# Altium PCB A3979alone.PcbDoc
Units mm, origin at the board's own origin, x right, y up, seen from the top; angles counter-clockwise.
Board outline 64 x 86 mm, 2 copper layers (Top Layer, Bottom Layer); 30 components, 35 nets, 135 pads, 63 vias.
Unrouted connection lines stored in the file: 1.
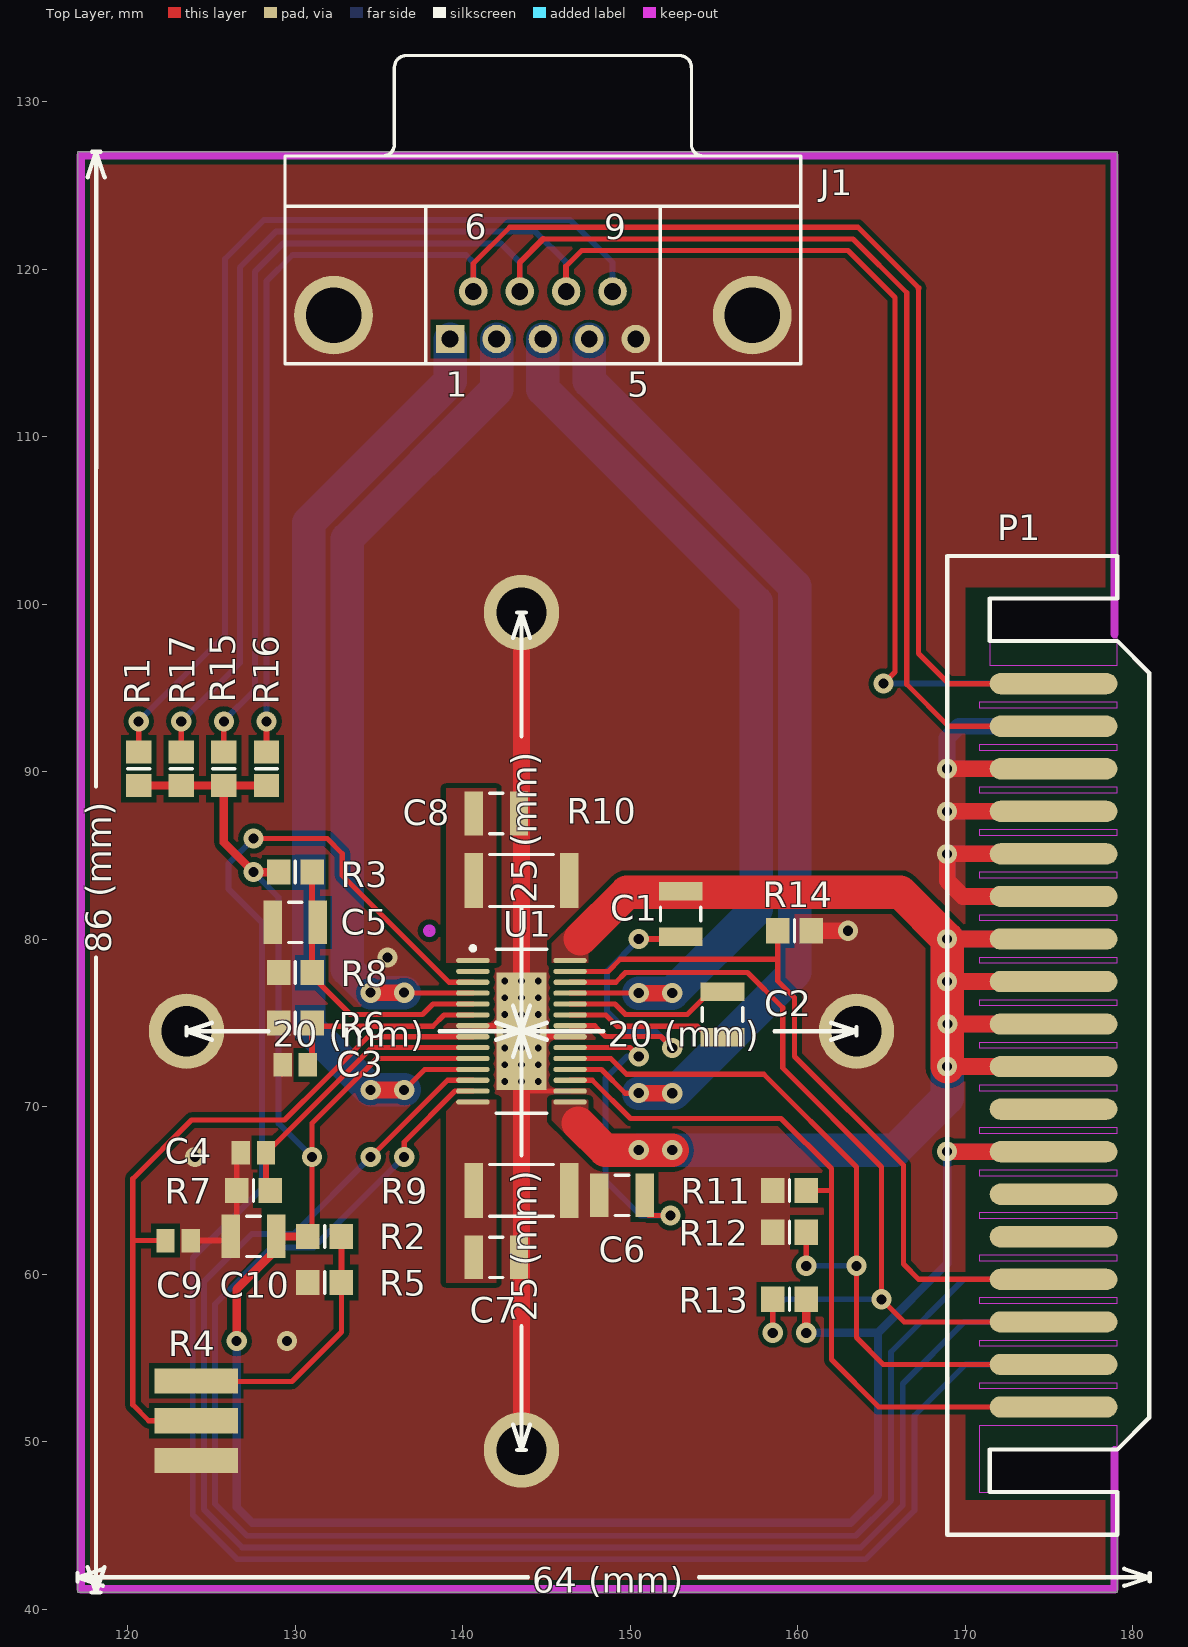
[diagram p0: Top Layer view]
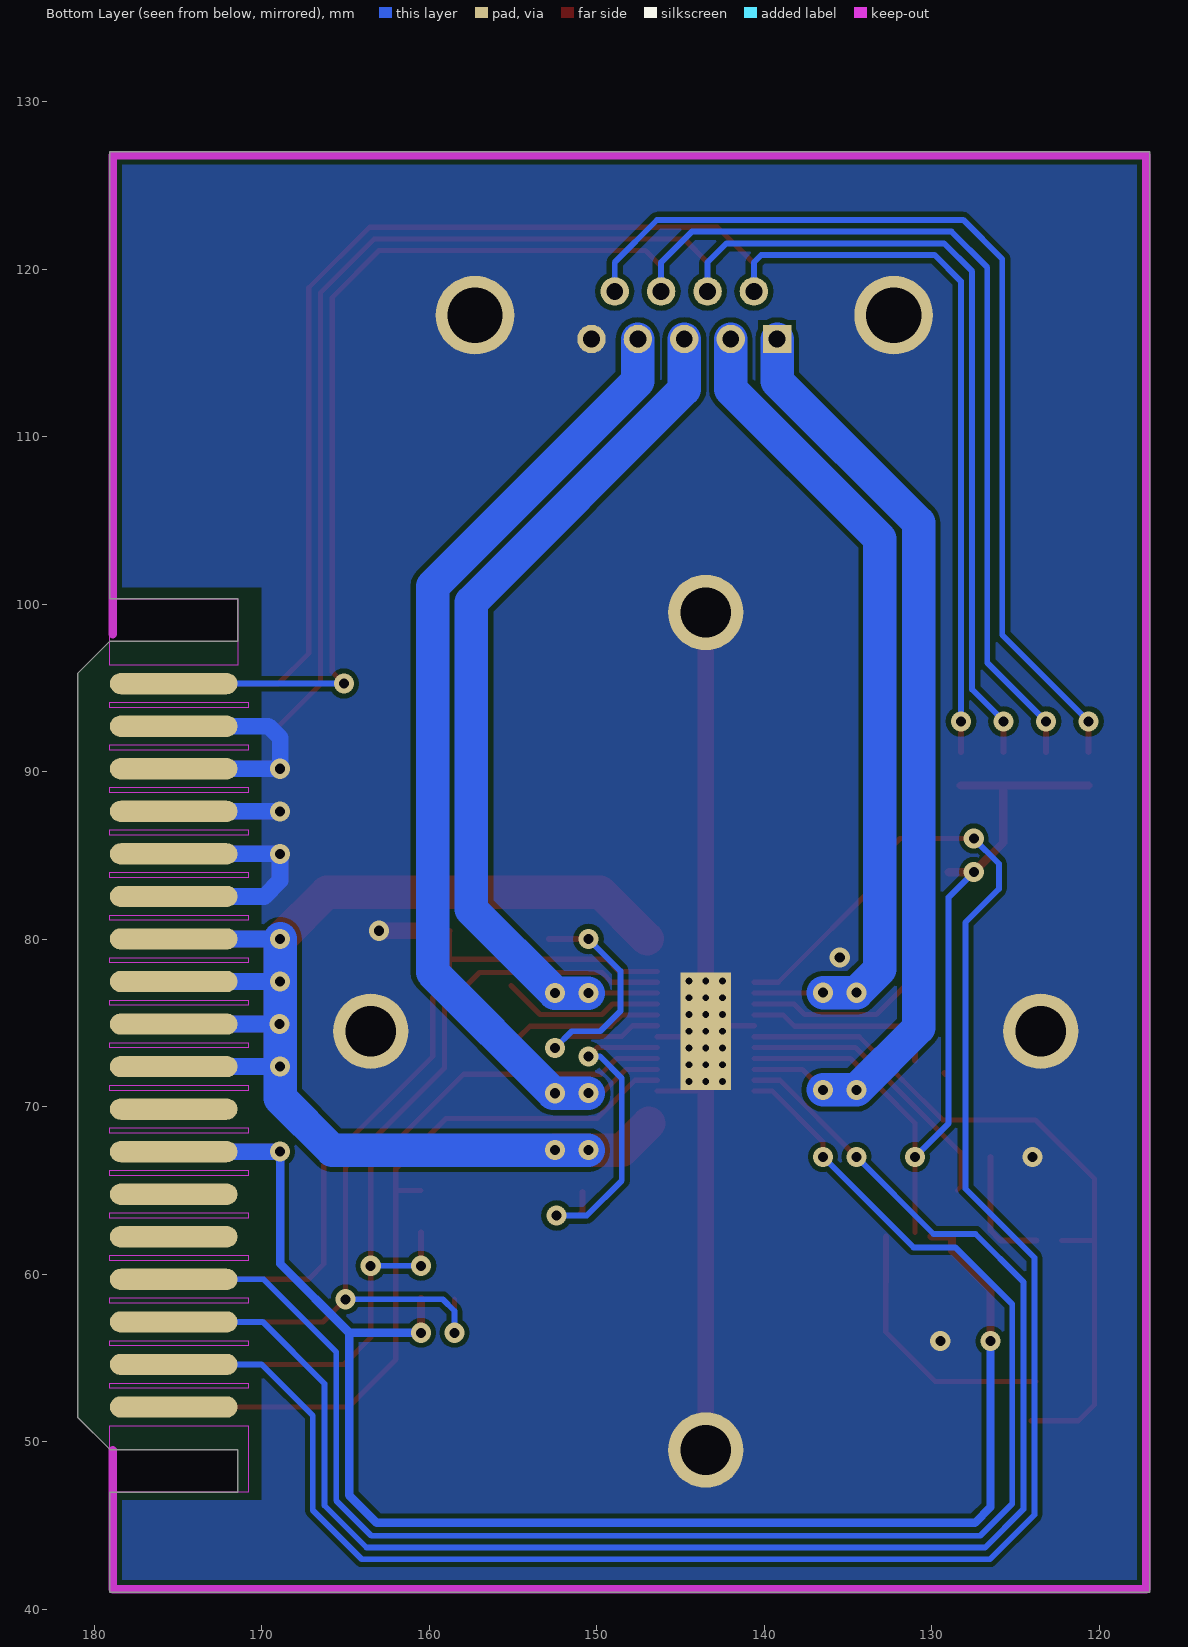
[diagram p1: Bottom Layer view, seen from below]

## Layer stack, top to bottom
Top Layer: signal copper 0.0356
Dielectric: core 0.32, FR-4, Dk 4.8
Bottom Layer: signal copper 0.0356

## Board outline
117,41 179.07,41 179.07,46.99 171.45,46.99 171.45,49.53 179.07,49.53 181,51.46 181,95.86 179.07,97.79 171.45,97.79 171.45,100.33 179.07,100.33 179.07,127 117,127

## Design rules (kind name [scope] priority, off if disabled: settings)
Clearance [All] p1: gap=0.3
PlaneClearance [All] p1: clearance=0.5
PlaneConnect [All] p1: planeconnectstyle=Direct reliefexpansion=0.508 reliefentries=4 reliefconductorwidth=0.254 reliefairgap=0.254
PolygonConnect [All] p1: connectstyle=Direct reliefconductorwidth=0.254 reliefentries=4 polygonreliefangle="90 Angle"
RoutingVias [All] p1: holewidth=0.6 width=1.2 viastyle="Through Hole" minholewidth=0.2 minwidth=0.6 maxholewidth=0.9 maxwidth=1.3
SMDNeckDown [All] p1: percent=200.000
SilkscreenOverComponentPads [All] p1: minsilkscreentomaskgap=0.254
SolderMaskExpansion [All] p1: expansion=0.102
Width [All] p1: maxlimit=2 minlimit=0.31 preferedwidth=0.35 checkconnectedcopper=TRUE
25 further rules are at their usual default settings.

## Components (designator, comment, footprint, x,y, rotation, side; value= is the part's Value field where it differs from the comment)
C1 "Cap" CAPC3225L 153,81.5 r90 top
C2 "Cap" CapC3225L 155.5,75.5 r270 top
C3 "Cap" CAPC2012L 130,72.5 r0 top
C4 "Cap" CAPC2012L 127.5,67.25 r0 top
C5 "Cap" CAPC3225L 130,81 r0 top
C6 "Cap" CAPC3225L 149.5,64.7 r0 top
C7 "Cap" CAPC3225L 142,61 r180 top
C8 "Cap" CAPC3225L 142,87.5 r180 top
C9 "Cap" CAPC2012L 123,62 r180 top
C10 "Cap" CAPC3225L 127.5,62.25 r0 top
J1 "D Connector 9" D-SUB-9 144.78,115.824 r0 top locked
P1 "18x2 Slot" SL-36 180.34,52.07 r90 top
R1 "Res2" RESC2012M 120.65,90.17 r90 top
R2 "Res2" RESC2012M 131.75,62.25 r180 top
R3 "Res2" RESC2012M 130,84 r180 top
R4 "RPot SM" VARRES1 122.5,51.25 r180 top
R5 "Res2" RESC2012M 131.75,59.5 r0 top
R6 "Res2" RESC2012M 130,75 r0 top
R7 "Res2" RESC2012M 127.5,65 r0 top
R8 "Res2" RESC2012M 130,78 r0 top
R9 "Res2" RESC6332L 143.5,65 r180 top
R10 "Res2" RESC6332L 143.5,83.5 r180 top
R11 "Res2" RESC2012M 159.5,65 r0 top
R12 "Res2" RESC2012M 159.5,62.5 r0 top
R13 "Res2" RESC2012M 159.5,58.5 r180 top
R14 "Res2" RESC2012M 159.8,80.5 r180 top
R15 "Res2" RESC2012M 125.73,90.17 r90 top
R16 "Res2" RESC2012M 128.27,90.17 r90 top
R17 "Res2" RESC2012M 123.19,90.17 r270 top
U1 "A3979" TSOP65P640_HS-28AM 143.5,74.5 r0 top

## Footprints (in the part's own frame and the unit in brackets; to place one, negate y for a bottom-side part, rotate by r counter-clockwise, add the part's x,y. Pads: shape width x height; smd on the part's side, far side on the other; paste and mask are expansions set on the pad)
CAPC2012L [mm] "Chip Capacitor, Body 2.0x1.3mm, IPC High Density"
  rect 1.1x1.4 smd: 1(-0.75,0) 2(0.75,0)
  body extent -1.1,-0.72 1.1,0.72, height 1.4
CAPC3225L [mm] "Chip Capacitor, Body 3.2x2.5mm, IPC High Density"
  rect 1.1x2.6 smd: 1(-1.35,0) 2(1.35,0)
  silkscreen extent -0.4,-1.2 0.4,1.2, body extent -1.7,-1.35 1.7,1.35, height 1.5
CapC3225L [mm] "Chip Capacitor, Body 3.2x2.5mm, IPC High Density"
  rect 1.1x2.6 smd: 1(-1.35,0) 2(1.35,0)
  silkscreen extent -0.4,-1.2 0.4,1.2, body extent -1.7,-1.35 1.7,1.35, height 1.5
D-SUB-9 [mm] "Connector"
  rect 1.7x1.7 hole 1: 1(-5.54,0)
  round 1.7 hole 1: 2(-2.77,0) 3(0,0) 4(2.77,0) 5(5.54,0) 6(-4.155,2.84) 7(-1.385,2.84) 8(1.385,2.84) 9(4.155,2.84)
  round 4.7 hole 3.3: 10(-12.495,1.42) 11(12.495,1.42)
  silkscreen extent -15.4,-1.48 15.4,16.92, body extent -15.49,-1.52 15.49,17.02, height 6.35
RESC2012M [mm] "Chip Resistor, Body 2.0x1.2mm, IPC Low Density"
  rect 1.4x1.5 smd: 1(-1,0) 2(1,0)
  silkscreen extent 0,-0.65 0,0.65, body extent -1.07,-0.7 1.07,0.7, height 0.7
RESC6332L [mm] "Chip Resistor, Body 6.3x3.2mm, IPC High Density"
  rect 1.1x3.3 smd: 1(-2.85,0) 2(2.85,0)
  silkscreen extent -1.9,-1.55 1.9,1.55, body extent -3.22,-1.68 3.22,1.68, height 0.9
SL-36 [mm]
  oval 1.27x7.62 smd: 1(0,5.08) 2(2.54,5.08) 3(5.08,5.08) 4(7.62,5.08) 5(10.16,5.08) 6(12.7,5.08) 7(15.24,5.08) 8(17.78,5.08) 9(20.32,5.08) 10(22.86,5.08) 11(25.4,5.08) 12(27.94,5.08) 13(30.48,5.08) 14(33.02,5.08) 15(35.56,5.08) 16(38.1,5.08) 17(40.64,5.08) 18(43.18,5.08)
  oval 1.27x7.62 smd far side: 19(0,5.08) 20(2.54,5.08) 21(5.08,5.08) 22(7.62,5.08) 23(10.16,5.08) 24(12.7,5.08) 25(15.24,5.08) 26(17.78,5.08) 27(20.32,5.08) 28(22.86,5.08) 29(25.4,5.08) 30(27.94,5.08) 31(30.48,5.08) 32(33.02,5.08) 33(35.56,5.08) 34(38.1,5.08) 35(40.64,5.08) 36(43.18,5.08)
  Keep-Out Layer region: 41.751,1.27 42.069,1.27 42.069,9.525 41.751,9.525
  Keep-Out Layer region: 39.211,1.27 39.529,1.27 39.529,9.525 39.211,9.525
  Keep-Out Layer region: 36.671,1.27 36.989,1.27 36.989,9.525 36.671,9.525
  Keep-Out Layer region: 34.131,1.27 34.449,1.27 34.449,9.525 34.131,9.525
  Keep-Out Layer region: 31.591,1.27 31.909,1.27 31.909,9.525 31.591,9.525
  Keep-Out Layer region: 29.051,1.27 29.369,1.27 29.369,9.525 29.051,9.525
  Keep-Out Layer region: 26.511,1.27 26.829,1.27 26.829,9.525 26.511,9.525
  Keep-Out Layer region: 23.971,1.27 24.289,1.27 24.289,9.525 23.971,9.525
  Keep-Out Layer region: 21.431,1.27 21.749,1.27 21.749,9.525 21.431,9.525
  Keep-Out Layer region: 18.891,1.27 19.209,1.27 19.209,9.525 18.891,9.525
  Keep-Out Layer region: 16.351,1.27 16.669,1.27 16.669,9.525 16.351,9.525
  Keep-Out Layer region: 13.811,1.27 14.129,1.27 14.129,9.525 13.811,9.525
  Keep-Out Layer region: 11.271,1.27 11.589,1.27 11.589,9.525 11.271,9.525
  Keep-Out Layer region: 8.731,1.27 9.049,1.27 9.049,9.525 8.731,9.525
  Keep-Out Layer region: 6.191,1.27 6.509,1.27 6.509,9.525 6.191,9.525
  Keep-Out Layer region: 3.651,1.27 3.969,1.27 3.969,9.525 3.651,9.525
  Keep-Out Layer region: 44.291,1.27 48.26,1.27 48.26,8.89 44.291,8.89
  Keep-Out Layer region: -5.08,1.27 -1.111,1.27 -1.111,9.525 -5.08,9.525
  Keep-Out Layer region: 1.111,1.27 1.429,1.27 1.429,9.525 1.111,9.525
  silkscreen extent -7.62,-0.64 50.8,11.43
TSOP65P640_HS-28AM [mm] "TSOP, 28-Leads, Body 9.7x4.4mm, Pitch 0.65mm, Exposed Pad, IPC Low Density"
  oval 2x0.31 smd: 1(-2.9,4.225) 2(-2.9,3.575) 3(-2.9,2.925) 4(-2.9,2.275) 5(-2.9,1.625) 6(-2.9,0.975) 7(-2.9,0.325) 8(-2.9,-0.325) 9(-2.9,-0.975) 10(-2.9,-1.625) 11(-2.9,-2.275) 12(-2.9,-2.925) 13(-2.9,-3.575) 14(-2.9,-4.225) 15(2.9,-4.225) 16(2.9,-3.575) 17(2.9,-2.925) 18(2.9,-2.275) 19(2.9,-1.625) 20(2.9,-0.975) 21(2.9,-0.325) 22(2.9,0.325) 23(2.9,0.975) 24(2.9,1.625) 25(2.9,2.275) 26(2.9,2.925) 27(2.9,3.575) 28(2.9,4.225)
  rect 3x7 all layers, no hole: 29(0,0)
  silkscreen extent -3.02,-4.9 1.5,5.07, body extent -2.25,-4.9 2.25,4.9, height 1.1
VARRES1 [mm] "Подстроечный резистор вертикально"
  rect 5x1.5 smd: CCW(-1.587,-2.381) CW(-1.588,2.381) W(-1.587,0)
  body extent 1.5,-3.19 5.5,3.19, height 6.37

## Part data
C1 C2 C3 C4 C5 C6 C7 C8 C9 C10: "Capacitor"
J1: "Receptacle Assembly, 9 Position, Right Angle"
R1 R2 R3 R5 R6 R7 R8 R9 R10 R11 R12 R13 R14 R15 R16 R17: "Resistor"
R4: "Square Trimming Potentiometer"
U1: "Microstepping DMOS Driver with Translator 2.5A"

## Free pads (board coordinates)
  round 4.5 hole 3: 0(123.5,74.5) 0(143.5,49.5) 0(143.5,99.5) 0(163.5,74.5)

## Via types
v1: diameter 1.2, hole 0.6, Top Layer to Bottom Layer, 42 vias
v2: diameter 0.8, hole 0.4, Top Layer to Bottom Layer, 21 vias

## Nets (pads, with @x,y where several pads share a name; then routed paths per layer and width w, separated by ;. In a path a pad name is that pad's centre, name@x,y a point inside that pad or via, vN(x,y) a via of type N, cw(c..) or ccw(c..) an arc to the next point about the centre after c; other vN are vias at no path point)
+30: C1.2 P1.9 P1.10 P1.11 P1.12 P1.27 P1.28 P1.29 P1.30 U1.15 U1.28 | length 120.7
  Top Layer w1: v1(168.91,72.39) P1.9 ; v1(168.91,77.47) P1.11 P1.11@172.72,77.47 ; v1(168.91,80.01) P1.12 ; P1.10 v1(168.94,74.93) ; v1(168.94,74.93) 168.91,74.9 v1(168.94,74.93)
  Top Layer w2: 146.9,69 148.5,67.4 v1(152.5,67.4) ; 147.002,80.01 149.792,82.8 166.12,82.8 v1(168.91,80.01) v1(168.91,72.39)
  Bottom Layer w1: v1(168.91,72.39) P1.27 ; v1@168.91,74.93 P1.28 ; v1(168.91,77.47) P1.29 ; v1(168.91,80.01) P1.30
  Bottom Layer w2: v1(150.5,67.4) 165.8,67.4 168.91,70.51 v1(168.91,72.39) v1(168.91,77.47) v1(168.91,80.01)
DIR: P1.20 U1.3 | length 121.6
  Top Layer w0.31: v1(127.5,86) 131.9,86 132.8,85.1 132.8,83.8 139.175,77.425 U1.3
  Bottom Layer w0.35: v1(127.5,86) 126,84.5 126,83 128,81 128,65.1 123.88,60.98 123.88,45.636 126.534,42.982 164.041,42.982 166.957,45.899 166.957,51.557 170.01,54.61 170.51,54.61 ; 170.5,54.6 170.51,54.61 ; P1.20 170.51,54.61
ENABLE: P1.3 R13.2 U1.26 | length 54.6
  Top Layer w0.31: U1.26 149.125,77.425 149.7,78 157,78 159.1,75.9 159.1,72.3 165,66.4 v1(165,58.5) 166.35,57.15 P1.3 ; v1(158.5,56.5) R13.2
  Bottom Layer w0.35: v1(158.5,56.5) 158.5,57.8 159.2,58.5 v1(165,58.5)
GND: C3.1 C4.1 C5.1 C6.1 C7.1 C8.1 C9.1 C10.1 J1.5 J1.10 J1.11 P1.13 P1.14 P1.15 P1.16 P1.31 P1.32 P1.33 P1.34 P1.35 pad.0 R4.CW R5.1 R6.1 R7.1 R8.1 R9.1 R10.1 R11.1 R12.1 R14.1 U1.7 U1.16 U1.21 U1.29 | length 131.7
  Top Layer w0.31: U1.7 U1.29@143.475,74.825 ; 143.525,70.925 U1.16 ; U1.29@143.525,74.175 U1.21
  Top Layer w0.35: C9.1 125.9,62 126.5,62.6 C4.1@126.5,67 ; C3.1@129.2,71.95 C3.1@129.25,72 ; U1.29@143.475,74.825 U1.29@143.5,74.8 ; 143.5,70.9 143.525,70.925 ; U1.29@143.5,74.2 U1.29@143.525,74.175
  Top Layer w1: pad.0@143.5,49.5 pad.0@143.5,99.5 ; R14.1 v1(163,80.5) ; v1(168.91,87.63) P1.15 ; v1(168.91,90.17) P1.16 ; P1.13 169.85,82.55 168.91,83.49 v1(168.91,85.09) P1.14
  Bottom Layer w0.254: v1@168.9,90.18 v1(168.91,90.17)
  Bottom Layer w1: v1@168.9,90.18 168.9,92 169.61,92.71 P1.35 ; v1(168.91,87.63) P1.33 ; v1(168.91,90.17) P1.34 ; P1.31 169.85,82.55 168.91,83.49 v1(168.91,85.09) P1.32
  other v1: 129.5,56 124,67 135.5,78.9
  other v2: 142.5,71.5 143.5,71.5 144.5,71.5 142.5,72.5 143.5,72.5 144.5,72.5 142.5,73.5 143.5,73.5 144.5,73.5 142.5,74.5 143.5,74.5 144.5,74.5 142.5,75.5 143.5,75.5 144.5,75.5 142.5,76.5 143.5,76.5 144.5,76.5 142.5,77.5 143.5,77.5 144.5,77.5
MS1: P1.22 U1.13 | length 95.5
  Top Layer w0.31: v1(136.5,67) 136.5,67.897 139.528,70.925 U1.13
  Bottom Layer w0.31: 169.865,59.69 P1.22
  Bottom Layer w0.35: v1(136.5,67) 131.1,61.6 128.6,61.6 125.2,58.2 125.2,46.296 127.114,44.382 163.461,44.382 165.557,46.478 165.557,55.358 169.865,59.665
MS2: P1.21 U1.12 | length 96.1
  Top Layer w0.31: v1(134.5,67) 139.075,71.575 U1.12
  Bottom Layer w0.35: v1(134.5,67) 129.9,62.4 127.4,62.4 124.54,59.54 124.54,45.966 126.824,43.682 163.751,43.682 166.257,46.189 166.257,53.458 169.95,57.15 170.55,57.15 P1.21
NetC1_1: C1.1 U1.22 | length 18.9
  Top Layer w0.31: U1.22 147.875,74.825 148.52,74.18 151.82,74.18 v1(152.5,73.5)
  Top Layer w0.35: v1(150.5,80) C1.1@152.85,80
  Bottom Layer w0.35: v1(150.5,80) 148.6,78.1 148.6,75.7 149.8,74.5 151.5,74.5 v1(152.5,73.5)
NetC2_1: C2.1 U1.24 | length 9.7
  Top Layer w0.31: U1.24 149.075,76.125 149.7,75.5 153.4,75.5 C2.1@155.125,77.225
NetC2_2: C2.2 U1.23 | length 9.6
  Top Layer w0.31: U1.23 148.525,75.475 149.2,74.8 154,74.8 154.65,74.15 C2.2
NetC3_2: C3.2 R6.2 U1.6 | length 12.1
  Top Layer w0.31: R6.2@131,74.8 138.2,74.8 138.875,75.475 U1.6
  Top Layer w0.35: C3.2@131,72.75 R6.2
NetC4_2: C4.2 R7.2 U1.9 | length 17.3
  Top Layer w0.254: R7.2@128.25,65.25 R7.2
  Top Layer w0.31: C4.2 128.284,67.25 131.034,70 132.385,71.351 134.559,73.525 U1.9
  Top Layer w0.35: R7.2@128.25,65.25 C4.2
NetC5_2: C5.2 R3.1 R8.2 U1.5 | length 17
  Top Layer w0.31: R8.2@131,77.8 133.3,75.5 137.6,75.5 138.225,76.125 U1.5
  Top Layer w0.35: R8.2@131,77.8 R3.1
NetC6_2: C6.2 U1.20 | length 20.5
  Top Layer w0.31: U1.20 149.975,73.525 v1(150.5,73) ; C6.2@150.85,63.75 151.1,63.5 v1(152.4,63.5)
  Top Layer w0.35: C6.2@150.85,63.75 C6.2@150.85,64.9
  Bottom Layer w0.35: v1(150.5,73) 149.815,73 148.516,71.701 148.516,65.584 150.6,63.5 v1(152.4,63.5)
NetC7_2: C7.2 R9.2 U1.14
NetC8_2: C8.2 R10.2 U1.1
NetC9_2: C9.2 R4.W U1.8 | length 43.4
  Top Layer w0.31: 120.3,62 C9.2 ; R4.W 121.25,51.25 120.3,52.2 120.3,65.69 123.81,69.2 129.358,69.2 131.765,71.607 134.333,74.175 U1.8
NetJ1_9: J1.9 R1.2 | length 58.5
  Top Layer w0.35: R1.2 v1(120.65,93)
  Bottom Layer w0.35: v1(120.65,93) 125.8,98.15 125.8,120.6 128.135,122.935 140.89,122.935 144.563,122.935 144.573,122.925 146.41,122.925 148.935,120.4 J1.9
NetP1_5: P1.5
NetP1_6: P1.6
NetP1_8: P1.8 P1.26
NetP1_19: P1.19
NetP1_23: P1.23
NetP1_24: P1.24
NetR2_1: R2.1 R4.CCW R5.2 | length 15.9
  Top Layer w0.31: R4.CCW@123.8,53.6 129.8,53.6 132.75,56.55 R5.2
  Top Layer w0.35: R5.2 R2.1
NULL: J1.8 P1.36 R17.1 | length 109.7
  Top Layer w0.254: v1@164.908,95.442 v1(165.1,95.25)
  Top Layer w0.31: 146.165,120.165 147.1,121.1 163,121.1 165.8,118.3 165.8,95.95 v1(165.1,95.25)
  Top Layer w0.35: R17.1 v1(123.19,93) ; J1.8 146.165,120.165
  Bottom Layer w0.35: v1@123.2,93 126.7,96.5 126.7,120.1 128.835,122.235 144.33,122.235 146.165,120.4 J1.8 ; v1(165.1,95.25) P1.36
OUT1A: J1.2 U1.4 | length 51.4
  Top Layer w0.31: v1@136.5,76.775 U1.4
  Top Layer w1: v1(134.5,76.8) v1(136.5,76.8)
  Bottom Layer w2: v1(136.5,76.8) v1(134.5,76.8) 133.1,78.2 133.1,103.9 142.01,112.81 J1.2
OUT1B: J1.3 U1.25 | length 54.6
  Top Layer w0.31: U1.25 v1(150.5,76.775)
  Top Layer w1: v1(150.5,76.775) v1(152.5,76.775)
  Bottom Layer w1: v1(150.5,76.775) v1@150.56,76.835
  Bottom Layer w2: J1.3 144.78,112.82 157.5,100.1 157.5,81.775 v1(152.5,76.775) v1(150.5,76.775)
OUT2A: J1.1 U1.11 | length 58.5
  Top Layer w0.31: v1(136.5,71) 137.725,72.225 U1.11
  Top Layer w1: v1(134.5,71) v1(136.5,71)
  Bottom Layer w2: v1(136.5,71) v1(134.5,71) 130.79,74.71 130.79,104.857 139.24,113.307 J1.1
OUT2B: J1.4 U1.18 | length 61.9
  Top Layer w0.31: U1.18 148.275,72.225 149.697,70.802 v1(150.5,70.802)
  Top Layer w1: v1(150.5,70.802) v1@152.498,70.802
  Bottom Layer w2: J1.4 147.55,113.317 159.81,101.057 159.81,78.013 152.6,70.802 v1(150.5,70.802)
  other v1: 152.5,70.8
POS1: J1.6 P1.18 R16.2 | length 104.3
  Top Layer w0.31: J1.6 140.625,120.325 142.8,122.5 163.58,122.5 167.2,118.88 ; 167.2,118.84 167.2,97.05 169,95.25 P1.18
  Top Layer w0.35: R16.2 v1(128.27,93) ; 167.2,118.84 167.2,118.88
  Bottom Layer w0.35: v1(128.27,93) 128.27,119.27 129.835,120.835 140.19,120.835 140.625,120.4 J1.6
POS2: J1.7 P1.17 R15.2 | length 108.3
  Top Layer w0.254: J1.7 J1.7@143.395,118.884
  Top Layer w0.31: J1.7 143.395,120.395 ; 144.8,121.8 163.29,121.8 166.5,118.59 166.5,95.21 169,92.71 P1.17
  Top Layer w0.35: R15.2 v1(125.73,93) ; 143.395,120.395 144.8,121.8
  Bottom Layer w0.35: v1@125.7,93 127.6,94.9 127.6,119.862 129.273,121.535 142.26,121.535 143.395,120.4 J1.7
RESET: P1.1 R11.2 U1.17 | length 45.1
  Top Layer w0.31: U1.17 147.725,71.575 150,69.3 159,69.3 162,66.3 162,54.9 164.83,52.07 P1.1 ; R11.2 162,65
SLEEP: P1.4 R14.2 U1.27 | length 45
  Top Layer w0.31: U1.27 148.675,78.075 149.4,78.8 158.8,78.8 ; R14.2 158.8,77.5 159.8,76.5 159.8,73 166.3,66.5 166.3,60.6 167.21,59.69 P1.4
STEP: P1.2 R12.2 U1.19 | length 47.4
  Top Layer w0.31: U1.19 148.825,72.875 149.765,71.935 153.065,71.935 157.965,71.935 163.5,66.4 163.5,56.21 165.1,54.61 P1.2
  Top Layer w0.35: v1(160.5,60.5) R12.2
  Bottom Layer w0.35: v1(160.5,60.5) v1(163.5,60.5)
VCC: C10.2 P1.7 P1.25 R1.1 R2.2 R3.2 R13.1 R15.1 R16.1 R17.2 U1.10 | length 150
  Top Layer w0.31: R2.2@131,62.5 v1(131,67) 131,69.006 133.1,71.106 134.869,72.875 U1.10
  Top Layer w0.5: R1.1 R16.1 ; R15.1 125.73,85.77 v1(127.5,84) R3.2 ; v1(126.5,56) 126.5,59.1 128.8,61.4 128.8,62.2 C10.2 130,62.25 ; v1(160.5,56.5) R13.1
  Top Layer w1: v1(168.91,67.31) P1.7
  Bottom Layer w0.35: v1(127.5,84) 129,82.5 129,69 v1(131,67)
  Bottom Layer w0.5: v1(126.5,56) 126.5,46.092 127.435,45.157 163.14,45.157 164.782,46.799 164.782,56.5 ; v1(160.5,56.5) 164.782,56.5 ; v1(168.91,67.31) 168.91,60.627 164.782,56.5
  Bottom Layer w1: v1(168.91,67.31) P1.25
pads on no net: U1.2

## Polygon pours and split planes (outlines as drawn)
GND on Top Layer "Top Layer-No Net" (solid, remove dead copper): 178.5,101 170,101 170,46.5 178.5,46.5 178.5,41.5 117.5,41.5 117.5,126.5 178.5,126.5
NetC8_2 on Top Layer "Top Layer-No Net" (solid, remove dead copper, pour order 1000): 142,78.6 139,78.6 139,89 142,89
NetC7_2 on Top Layer "Top Layer-No Net" (solid, remove dead copper, pour order 1001): 142,59.5 139,59.5 139,70.4 142,70.4
+30 on Top Layer "Top Layer-No Net" (solid, remove dead copper, pour order 1002): 146.6,81 145.3,79.752 145.3,78.6 147.5,78.6 147.5,81
+30 on Top Layer "Top Layer-No Net" (solid, remove dead copper, pour order 1003): 147.5,70.4 147.5,69.8 148,69.3 148,68.3 146.2,68.3 145.3,69.2 145.3,70.4
GND on Bottom Layer "Top Layer-No Net" (solid, remove dead copper): 178.5,46.5 170,46.5 170,101 178.5,101 178.5,126.5 117.5,126.5 117.5,41.5 178.5,41.5

## Keep-outs
Top Layer:
  circle w0.35 net +30: c138,80.5 r0.2
Keep-Out Layer:
  lines w0.5: 178.9,49.5 178.9,41.2 117.2,41.2 117.2,126.8 178.9,126.8 178.9,98.2

## Silkscreen, mask and mechanical layers (free items; w line width, h text height)
Top Overlay:
  lines w0.254: 117,41.646 117,42.154 ; 117.592,42.524 118.1,41 ; 117.602,125.476 118.11,127 ; 117.846,41 118.354,41 ; 117.856,127 118.364,127 ; 118.104,78.896 118.1,41 ; 118.106,89.104 118.11,127 ; 118.524,41.392 117,41.9 ; 118.524,42.408 117,41.9 ; 118.608,42.524 118.1,41 ; 118.618,125.476 118.11,127 ; 123.5,74.246 123.5,74.754 ; 125.024,73.992 123.5,74.5 ; 125.024,75.008 123.5,74.5 ; 128.396,74.5 123.5,74.5 ; 138.604,74.5 143.5,74.5 ; 141.976,73.992 143.5,74.5 ; 141.976,75.008 143.5,74.5 ; 142.992,51.024 143.5,49.5 ; 142.992,72.976 143.5,74.5 ; 142.992,76.024 143.5,74.5 ; 142.992,97.976 143.5,99.5 ; 143.246,49.5 143.754,49.5 ; 143.246,99.5 143.754,99.5 ; 143.5,56.896 143.5,49.5 ; 143.5,67.104 143.5,74.5 ; 143.5,81.896 143.5,74.5 ; 143.5,92.104 143.5,99.5 ; 143.896,41.9 117,41.9 ; 144.008,51.024 143.5,49.5 ; 144.008,72.976 143.5,74.5 ; 144.008,76.024 143.5,74.5 ; 144.008,97.976 143.5,99.5 ; 145.024,73.992 143.5,74.5 ; 145.024,75.008 143.5,74.5 ; 148.396,74.5 143.5,74.5 ; 154.104,41.9 181,41.9 ; 158.604,74.5 163.5,74.5 ; 161.976,73.992 163.5,74.5 ; 161.976,75.008 163.5,74.5 ; 163.5,74.246 163.5,74.754 ; 179.476,41.392 181,41.9 ; 179.476,42.408 181,41.9 ; 181,41.646 181,42.154 ; 143.246,74.5 143.754,74.5 143.246,74.5 ; 143.5,74.246 143.5,74.754 143.5,74.246
  text "25 (mm)" at 144.414,82.15 h1.52 r90
  text "86 (mm)" at 119.019,79.15 h1.52 r89.99
  text "20 (mm)" at 128.65,73.586 h1.52
  text "20 (mm)" at 148.65,73.586 h1.52
  text "25 (mm)" at 144.414,57.15 h1.52 r90
  text "64 (mm)" at 144.15,40.986 h1.52
Mechanical 1:
  lines w0.254: 117,41 117,127 179,127 179,100.3 171.5,100.3 171.5,97.8 179.1,97.8 181,95.9 181,51.5 179,49.5 171.5,49.5 171.5,47 179,47 179,41 117,41

## Text inside footprints (layer, text, board x,y; h text height)
J1: Top Overlay "1" at 138.99,112.369 h1.5; Top Overlay "5" at 149.82,112.369 h1.5; Top Overlay "9" at 148.435,121.769 h1.5; Top Overlay "6" at 140.125,121.769 h1.5